# EAGLE board EagleSample (EAGLE 7.7.0)
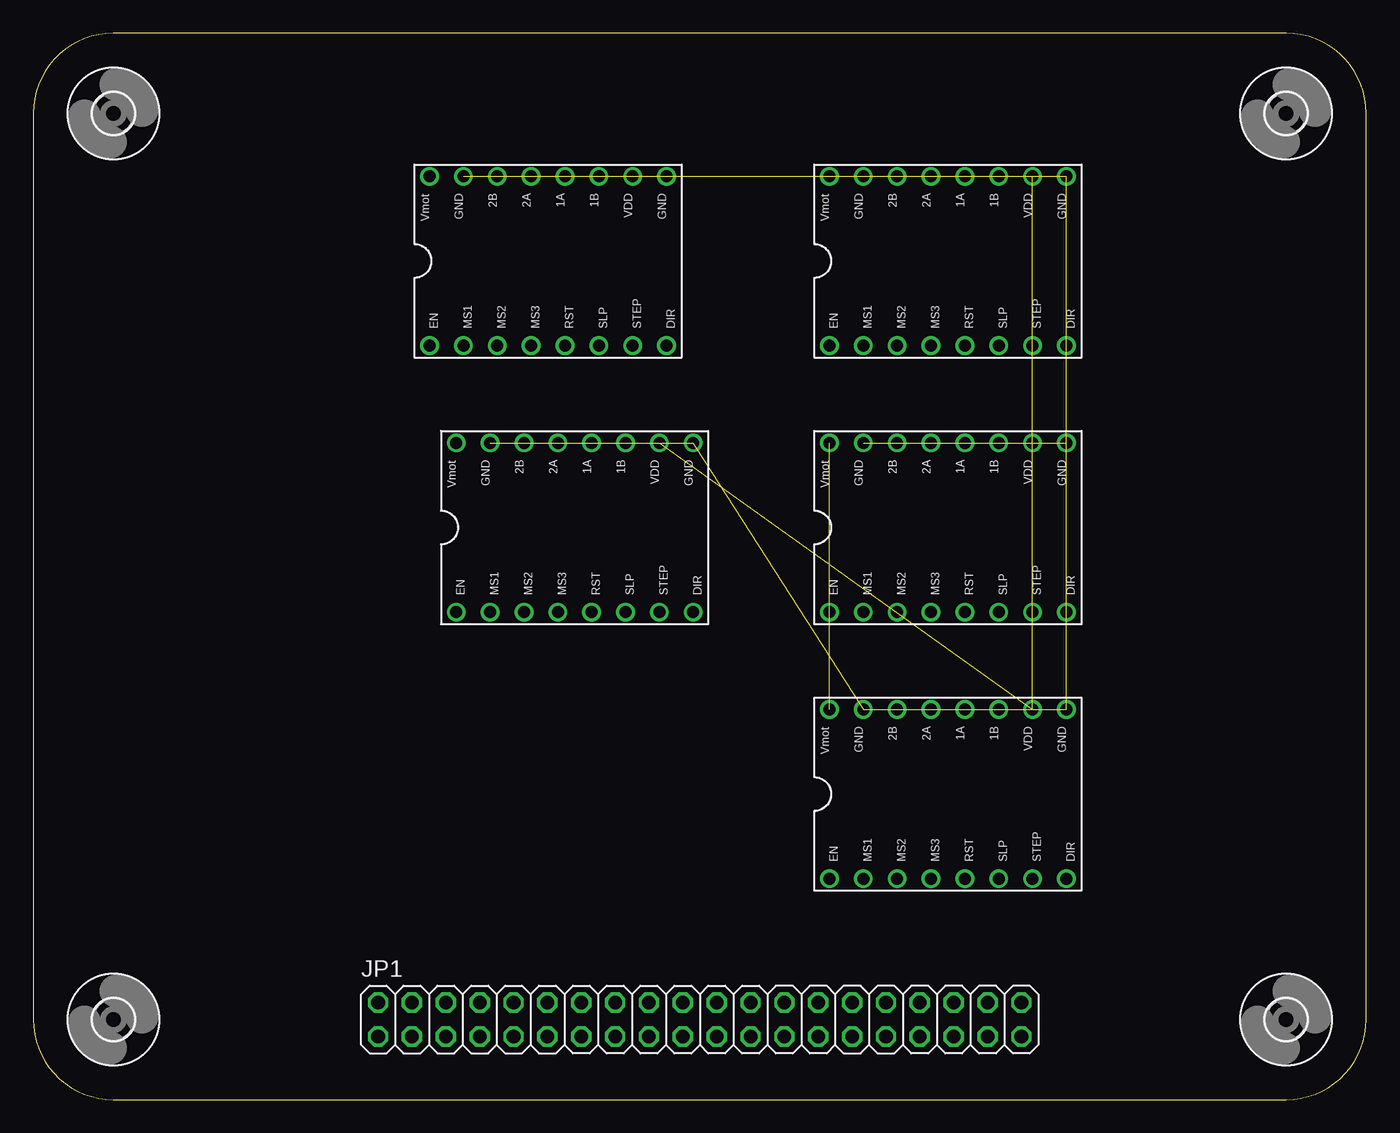
[diagram p0: board, top side]
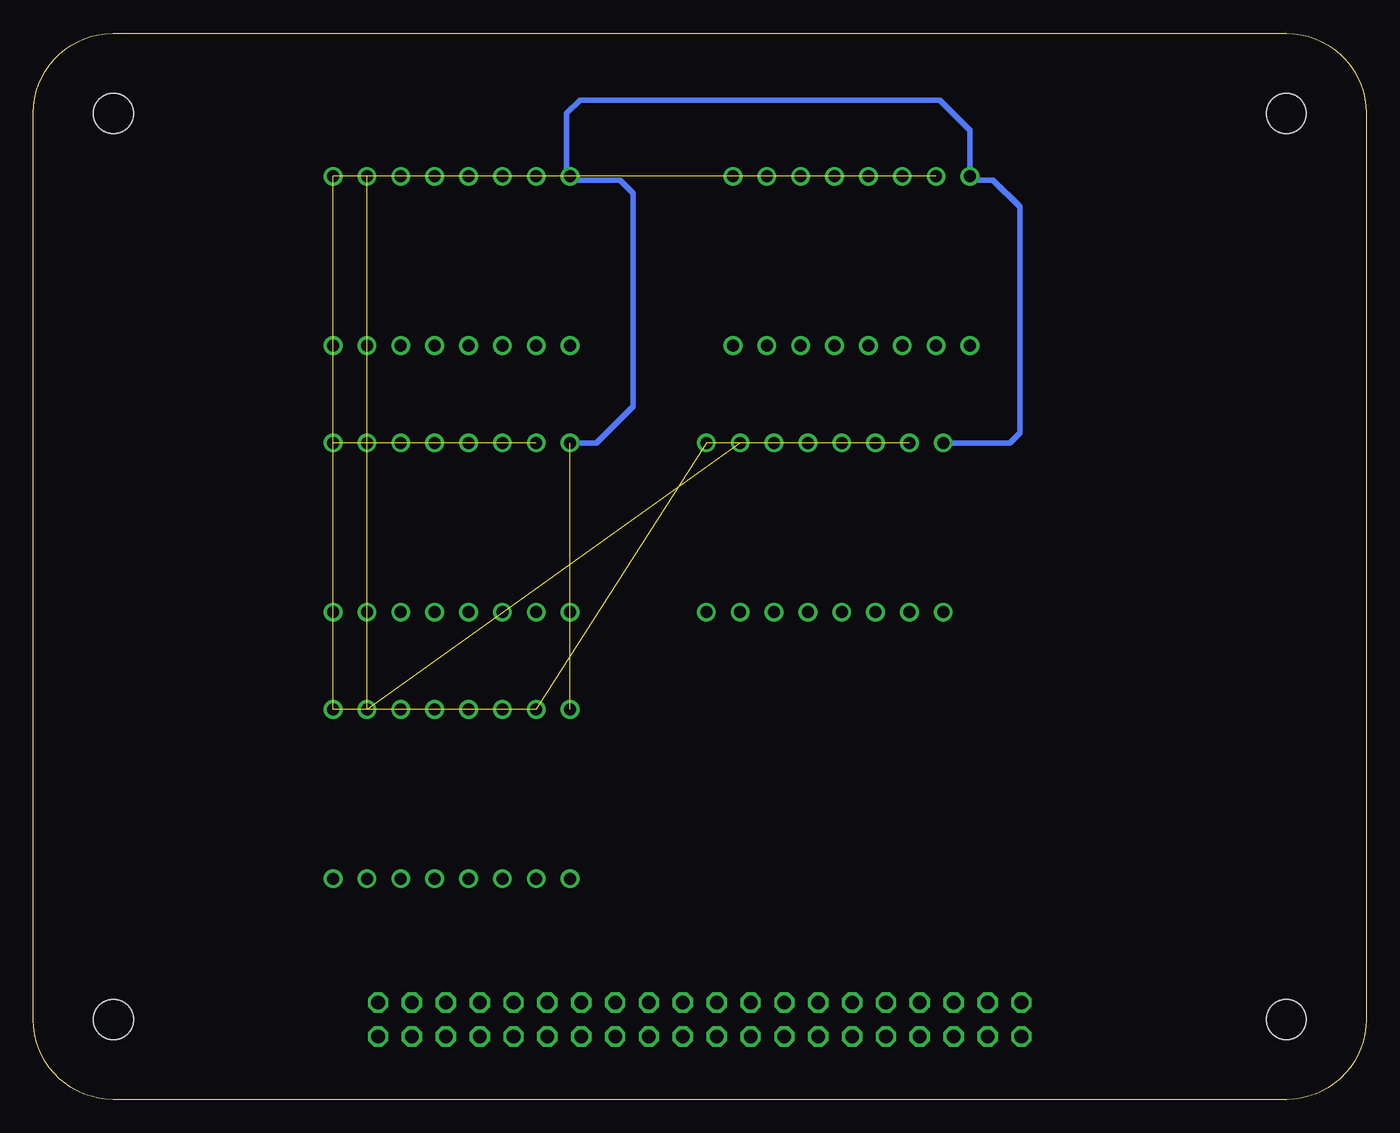
[diagram p1: board, bottom side, seen from below]

Size 100 x 80 mm. Coordinates in mm from the lower left corner, seen from the top.
Outline: 0,74 0,6 arc90 6,0 94,0 arc90 100,6 100,74 arc90 94,80 6,80 arc90 0,74
Copper layers (1*16): Top 0.035mm / dielectric 1.5mm / Bottom 0.035mm
Design rules "default": minimum track width 10mil, minimum drill 24mil, track to track 8mil, track to pad 8mil, pad to pad 8mil, via to via 8mil, smd to smd 8mil, copper to edge 40mil, drill to drill 8mil, minimum pad ring 10mil, minimum via ring 8mil, stop-mask expansion 4mil, vias tented up to drill 0mil, thermal gap 10mil

## Footprints (pad centres in the part's own frame; a part is rotated, then mirrored left to right if it is on the bottom)
2X20 = drill 1.016 octagon: 1 -24.13,-1.27; 2 -24.13,1.27; 3 -21.59,-1.27; 4 -21.59,1.27; 5 -19.05,-1.27; 6 -19.05,1.27; 7 -16.51,-1.27; 8 -16.51,1.27; 9 -13.97,-1.27; 10 -13.97,1.27; 11 -11.43,-1.27; 12 -11.43,1.27; 13 -8.89,-1.27; 14 -8.89,1.27; 15 -6.35,-1.27; 16 -6.35,1.27; 17 -3.81,-1.27; 18 -3.81,1.27; 19 -1.27,-1.27; 20 -1.27,1.27; 21 1.27,-1.27; 22 1.27,1.27; 23 3.81,-1.27; 24 3.81,1.27; 25 6.35,-1.27; 26 6.35,1.27; 27 8.89,-1.27; 28 8.89,1.27; 29 11.43,-1.27; 30 11.43,1.27; 31 13.97,-1.27; 32 13.97,1.27; 33 16.51,-1.27; 34 16.51,1.27; 35 19.05,-1.27; 36 19.05,1.27; 37 21.59,-1.27; 38 21.59,1.27; 39 24.13,-1.27; 40 24.13,1.27
3,0 = hole 3: 0,0
A4988BREAKOUT = drill 0.9: 1A 8.89,1.27; 1B 11.43,1.27; 2A 6.35,1.27; 2B 3.81,1.27; DIR 16.51,-11.43; EN -1.27,-11.43; GND 16.51,1.27; GND@0 1.27,1.27; MS1 1.27,-11.43; MS2 3.81,-11.43; MS3 6.35,-11.43; RST 8.89,-11.43; SLP 11.43,-11.43; STEP 13.97,-11.43; VDD 13.97,1.27; VMOT -1.27,1.27

## Placement (x,y rotation side)
JP1  [2X20]  50,6 0 top
U$1  [3,0]  6,74 0 top
U$2  [3,0]  6,6 0 top
U$3  [3,0]  94,6 0 top
U$4  [3,0]  94,74 0 top
U$5  A4988BREAKOUT  [A4988BREAKOUT]  61,68 0 top
U$6  A4988BREAKOUT  [A4988BREAKOUT]  61,48 0 top
U$7  A4988BREAKOUT  [A4988BREAKOUT]  61,28 0 top
U$8  A4988BREAKOUT  [A4988BREAKOUT]  31,68 0 top
U$9  A4988BREAKOUT  [A4988BREAKOUT]  33,48 0 top

## Library data of the parts
JP1 = pinhead
U$1-U$4 = holes
U$5-U$9 = RepRapjr

## Nets
GND: U$5.GND U$5.GND@0 U$6.GND U$6.GND@0 U$7.GND U$7.GND@0 U$8.GND U$8.GND@0 U$9.GND U$9.GND@0
VDD: U$5.VDD U$6.VDD U$7.VDD U$8.VDD U$9.VDD
VMOT: U$5.VMOT U$6.VMOT U$7.VMOT U$8.VMOT U$9.VMOT

## Tracks (layer width: path | path; a pad name or v marks a point on that pad's centre or on a via)
GND  (9 unrouted)
VDD  (4 unrouted)
VMOT  (1 unrouted)
  Bottom 0.406: U$6.VMOT 57.73,49.27 55,52 55,68 56,69 59.46,69 U$5.VMOT 60,69.54 60,74 59,75 32,75 29.73,72.73 U$8.VMOT 29.46,69 28,69 26,67 26,50 26.73,49.27 U$9.VMOT